# Altium PCB CAN_Transceiver Breakout Board.PcbDoc
Units mil, origin at the board's own origin, x right, y up, seen from the top; angles counter-clockwise.
Board outline 1020 x 1190 mil, 2 copper layers (Top Layer, Bottom Layer); 6 components, 7 nets, 26 pads, 2 vias.
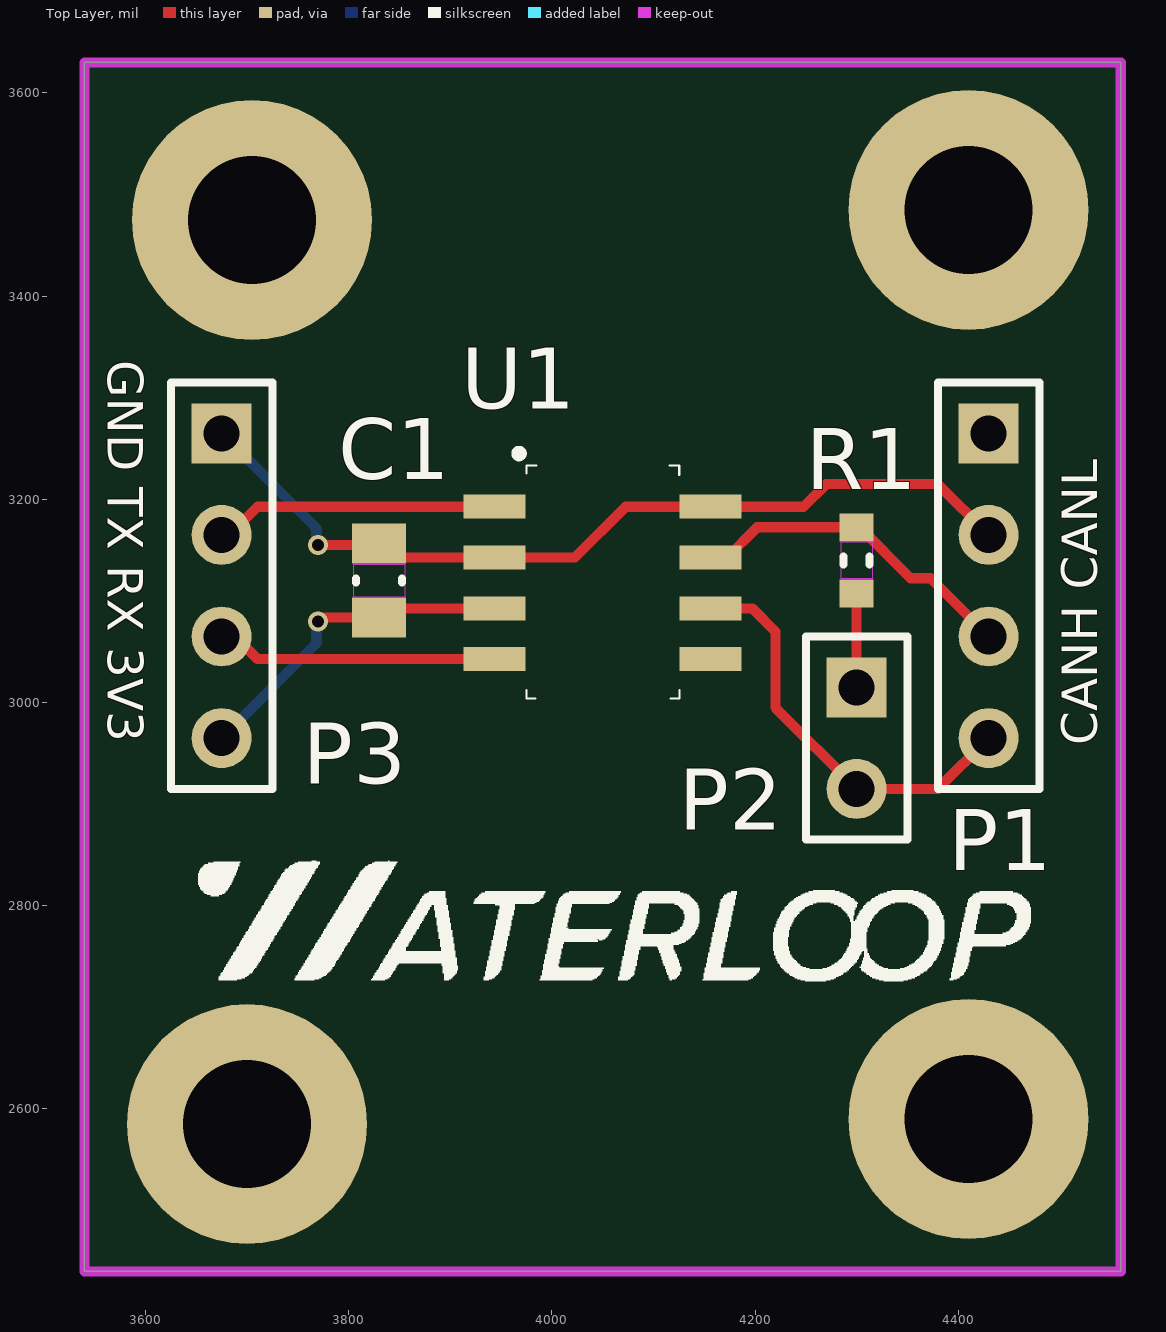
[diagram p0: Top Layer view]
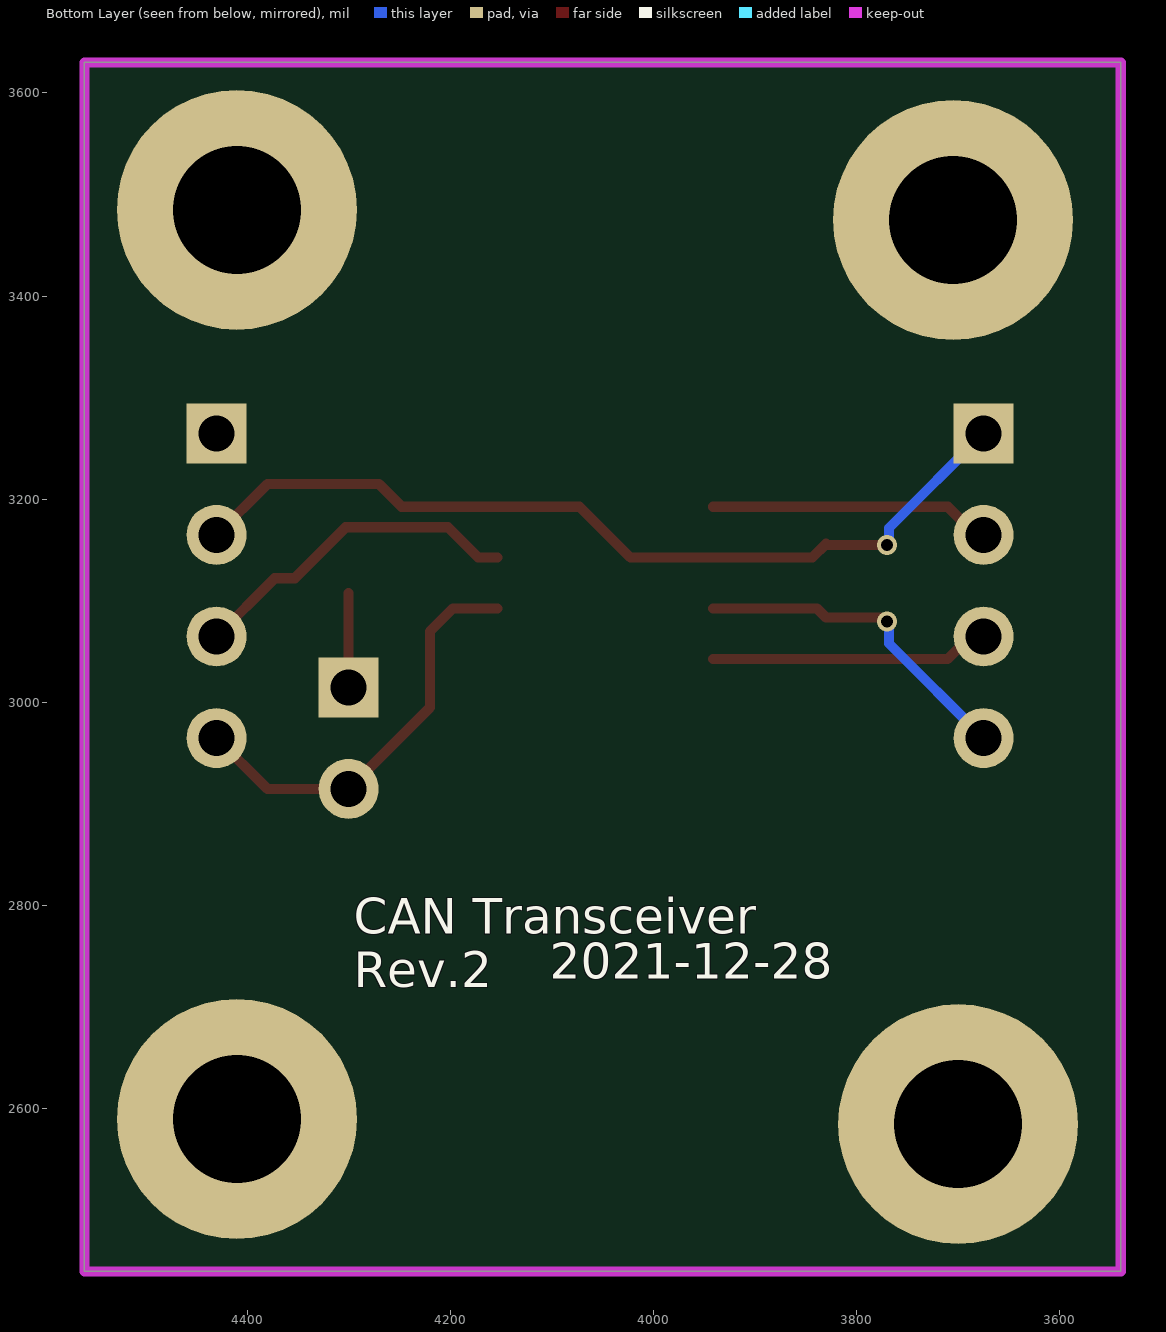
[diagram p1: Bottom Layer view, seen from below]
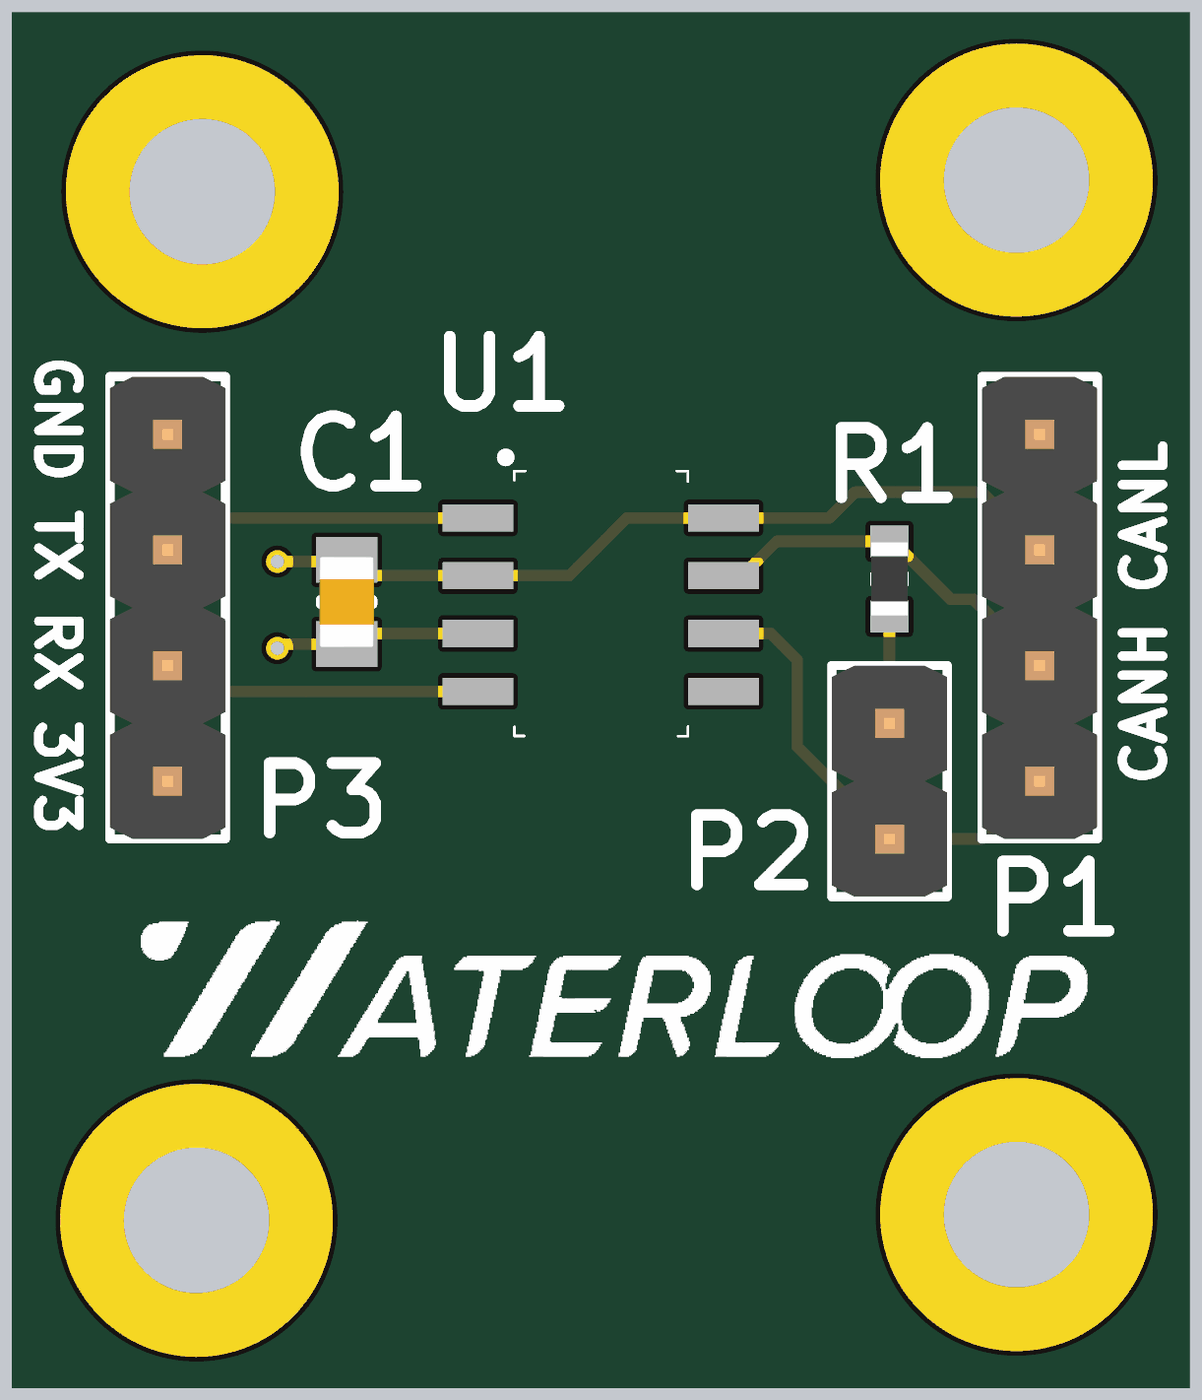
[diagram p2: 3D render of the assembled board from above, using the file's embedded part models]

## Layer stack, top to bottom
Top Solder: solder mask 0.4, Solder Resist, Dk 3.5
Top Layer: signal copper 1.4
Dielectric 1: dielectric 12.6, FR-4, Dk 4.8
Bottom Layer: signal copper 1.4
Bottom Solder: solder mask 0.4, Solder Resist, Dk 3.5

## Board outline
3540,2440 3540,3630 4560,3630 4560,2440

## Design rules (kind name [scope] priority, off if disabled: settings)
Clearance [All] p1: gap=10 ignorepadtopadclearanceinfootprint=FALSE except(0: Arc-Hole Track-Hole SMDPad-Hole THPad-Hole Via-Hole Fill-Hole Poly-Hole Region-Hole Text-Hole)
PolygonConnect PolygonConnect_1 [All vs IsNamedPolygon('GND_L02_P001')] p1: connectstyle=Direct reliefconductorwidth=10 reliefentries=4 polygonreliefangle="90 Angle" airgapwidth=10
PolygonConnect [All] p2: connectstyle=Relief reliefconductorwidth=10 reliefentries=4 polygonreliefangle="90 Angle" airgapwidth=10
RoutingVias [All] p1: holewidth=28 width=50 viastyle="Through Hole" minholewidth=28 minwidth=50 maxholewidth=28 maxwidth=50
SolderMaskExpansion [All] p1: expansion=4 istentingtop=FALSE
Width [All] p1: maxlimit=10 minlimit=10 preferedwidth=10
30 further rules are at their usual default settings.

## Components (designator, comment, footprint, x,y, rotation, side; value= is the part's Value field where it differs from the comment)
C1 "Capacitor - Nonpolarized" "0805 - Capacitor" 3830,3120 r270 top value=100nF
P1 "1x4 Header" HDR1X4 4430,3265 r270 top
P2 "1x2 Header" HDR1X2 4300,3015 r270 top
P3 "1x4 Header" HDR1X4 3675,3265 r270 top
R1 "Resistor" "0603 - Resistor" 4300,3140 r270 top value=120
U1 "SN65HVD230" SN65HVD230 4050,3125 r0 top

## Footprints (in the part's own frame and the unit in brackets; to place one, negate y for a bottom-side part, rotate by r counter-clockwise, add the part's x,y. Pads: shape width x height; smd on the part's side, far side on the other; paste and mask are expansions set on the pad)
"0603 - Resistor" [mm] "0603 Chip Resistor - IPC Medium Density"
  rect 0.7x0.85 smd: 1(-0.825,0) 2(0.825,0)
  Top Layer keep-out region: -0.45,0.4 -0.45,-0.4 0.45,-0.4 0.45,0.4
  silkscreen extent -0.1,-0.33 0.1,0.33, body extent -0.8,-0.4 0.8,0.4, height 0.45
"0805 - Capacitor" [mm] "0805 Chip Capacitor - IPC Medium Density"
  rect 1x1.35 smd: 1(-0.925,0) 2(0.925,0)
  Top Layer keep-out region: -0.4,0.65 -0.4,-0.65 0.4,-0.65 0.4,0.65
  silkscreen extent -0.05,-0.58 0.05,0.58, body extent -1,-0.6 1,0.6, height 1.2
HDR1X2 [mm] "Connector; Header; 2 Position"
  rect 1.5x1.5 hole 0.9: 1(0,0)
  round 1.5 hole 0.9: 2(2.54,0)
  silkscreen extent -1.27,-1.27 3.81,1.27, body extent -1.27,-1.27 3.81,1.27, height 8.54
HDR1X4 [mm] "Connector; Header; 4 Position"
  rect 1.5x1.5 hole 0.9: 1(0,0)
  round 1.5 hole 0.9: 2(2.54,0) 3(5.08,0) 4(7.62,0)
  silkscreen extent -1.27,-1.27 8.89,1.27, body extent -1.27,-1.27 8.89,1.27, height 8.54
SN65HVD230 [mm] "3.3V CAN Transeiver with standby mode"
  rect 1.55x0.6 smd: 1(-2.7,1.72) 2(-2.7,0.45) 3(-2.7,-0.82) 4(-2.7,-2.09) 5(2.7,-2.09) 6(2.7,-0.82) 7(2.7,0.45) 8(2.7,1.72)
  silkscreen extent -2.16,-3.07 1.92,3.12

## Part data
C1: "Nonpolarized Capacitor", Manufacturer=YAGEO, Manufacturer Part Number=CC0805KPX7R9BB104, Supplier Part Number=13-CC0805KPX7R9BB104CT-ND, Supplier=Digikey
P1 P3: "1x4 Pin Header"
P2: "1x2 Pin Header"
R1: Manufacturer=YAGEO, Manufacturer Part Number=RC0603FR-10120RL, Supplier Part Number=13-RC0603FR-10120RLCT-ND, Supplier=Digikey
U1: "3.3V CAN Transeiver with standby"

## Free pads (board coordinates)
  round 236.22 hole 125.98: 4(3700,2585) 4(3705,3475) 4(4410,2590) 4(4410,3485)

## Via types
v1: diameter 19.68, hole 11.81, Top Layer to Bottom Layer, 2 vias

## Nets (pads, with @x,y where several pads share a name; then routed paths per layer and width w, separated by ;. In a path a pad name is that pad's centre, name@x,y a point inside that pad or via, vN(x,y) a via of type N, cw(c..) or ccw(c..) an arc to the next point about the centre after c; other vN are vias at no path point)
3V3: C1.2 P3.4 U1.3 | length 330.8
  Top Layer w10: v1(3770,3080) 3772.62,3080 3776.2,3083.58 C1.2 3839.13,3092.72 U1.3@3941.18,3092.72
  Bottom Layer w10: P3.4 3768.15,3058.15 3768.15,3078.15 v1(3770,3080)
CANH_P: P1.3 R1.1 U1.7 | length 333.1
  Top Layer w10: U1.7@4153.78,3142.72 4172.48,3142.72 4202.24,3172.48 R1.1 4302.95,3172.48 4353.07,3122.36 4372.64,3122.36 P1.3
CANL_N: P1.4 P2.2 U1.6 | length 414.5
  Top Layer w10: U1.6@4153.78,3092.72 4197.28,3092.72 4220,3070 4220,2995 P2.2 4380,2915 P1.4
GND: C1.1 P1.2 P3.1 U1.2 U1.8 | length 863.7
  Top Layer w10: v1(3770,3155) 3828.58,3155 C1.1 3843.7,3142.72 4022.72,3142.72 4072.72,3192.72 U1.8@4153.78,3192.72 ; U1.8 4247.72,3192.72 4270,3215 4380,3215 P1.2
  Bottom Layer w10: P3.1 3768.15,3171.85 3768.15,3156.85 v1(3770,3155)
res: P2.1 R1.2 | length 92.5
  Top Layer w10: P2.1 R1.2
RX: P3.3 U1.4 | length 275.4
  Top Layer w10: P3.3 3688.27,3065 3710.56,3042.72 U1.4@3941.18,3042.72
TX: P3.2 U1.1 | length 277.7
  Top Layer w10: P3.2 3682.54,3165 3710.25,3192.72 U1.1@3941.18,3192.72
pads on no net: P1.1 U1.5

## Keep-outs
Keep-Out Layer:
  the board outline again, w10

## Silkscreen, mask and mechanical layers (free items; w line width, h text height)
Top Overlay:
  drawing of 10 lines, arcs and shapes, not listed
  text "GND TX RX 3V3" at 3563,3337 h35 r270
  text "CANH CANL" at 4537,2958 h35 r90
Bottom Overlay:
  text "2021-12-28" at 4102,2728 h35
  text "CAN Transceiver  / Rev.2" at 4295,2720 h35